# Altium PCB UL-SWAP-DAQ-2.PcbDoc (part 1 of 2)
Units mil, origin at the board's own origin, x right, y up, seen from the top; angles counter-clockwise.
Board outline 3000 x 3000 mil, 4 copper layers (Top Layer, GND, PWR, Bottom Layer), stack 23.756 mil thick; 123 components, 110 nets, 387 pads, 5 vias.
Unrouted connection lines stored in the file: 181.
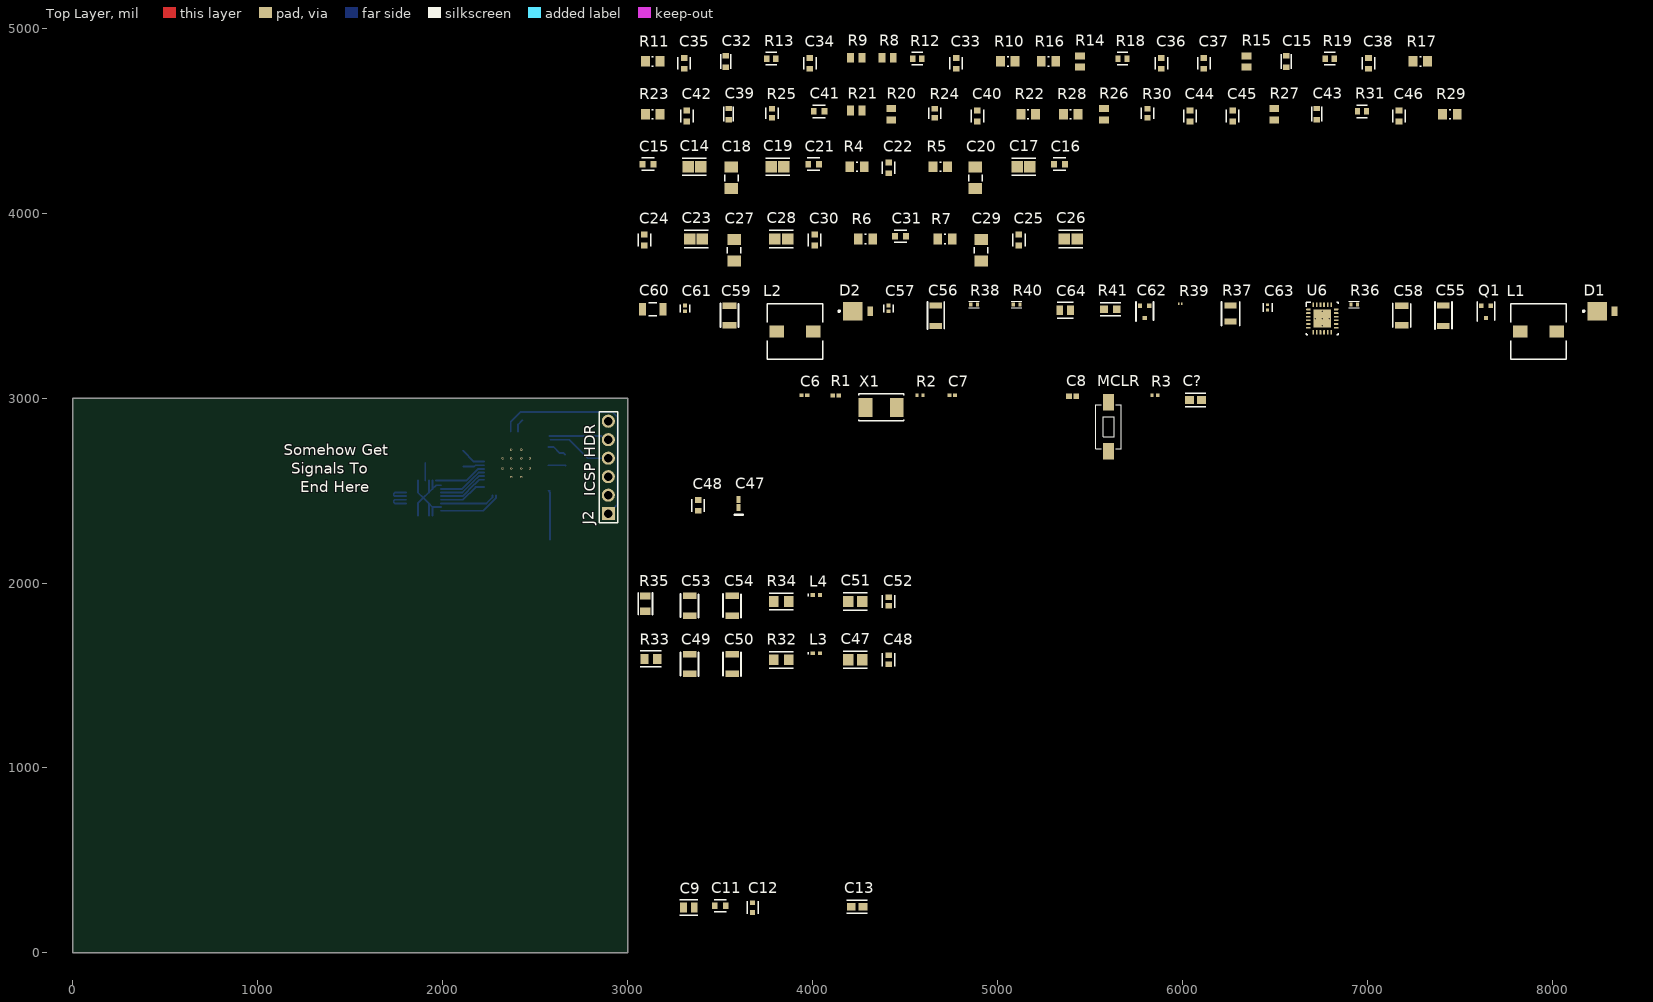
[diagram p0: Top Layer view]
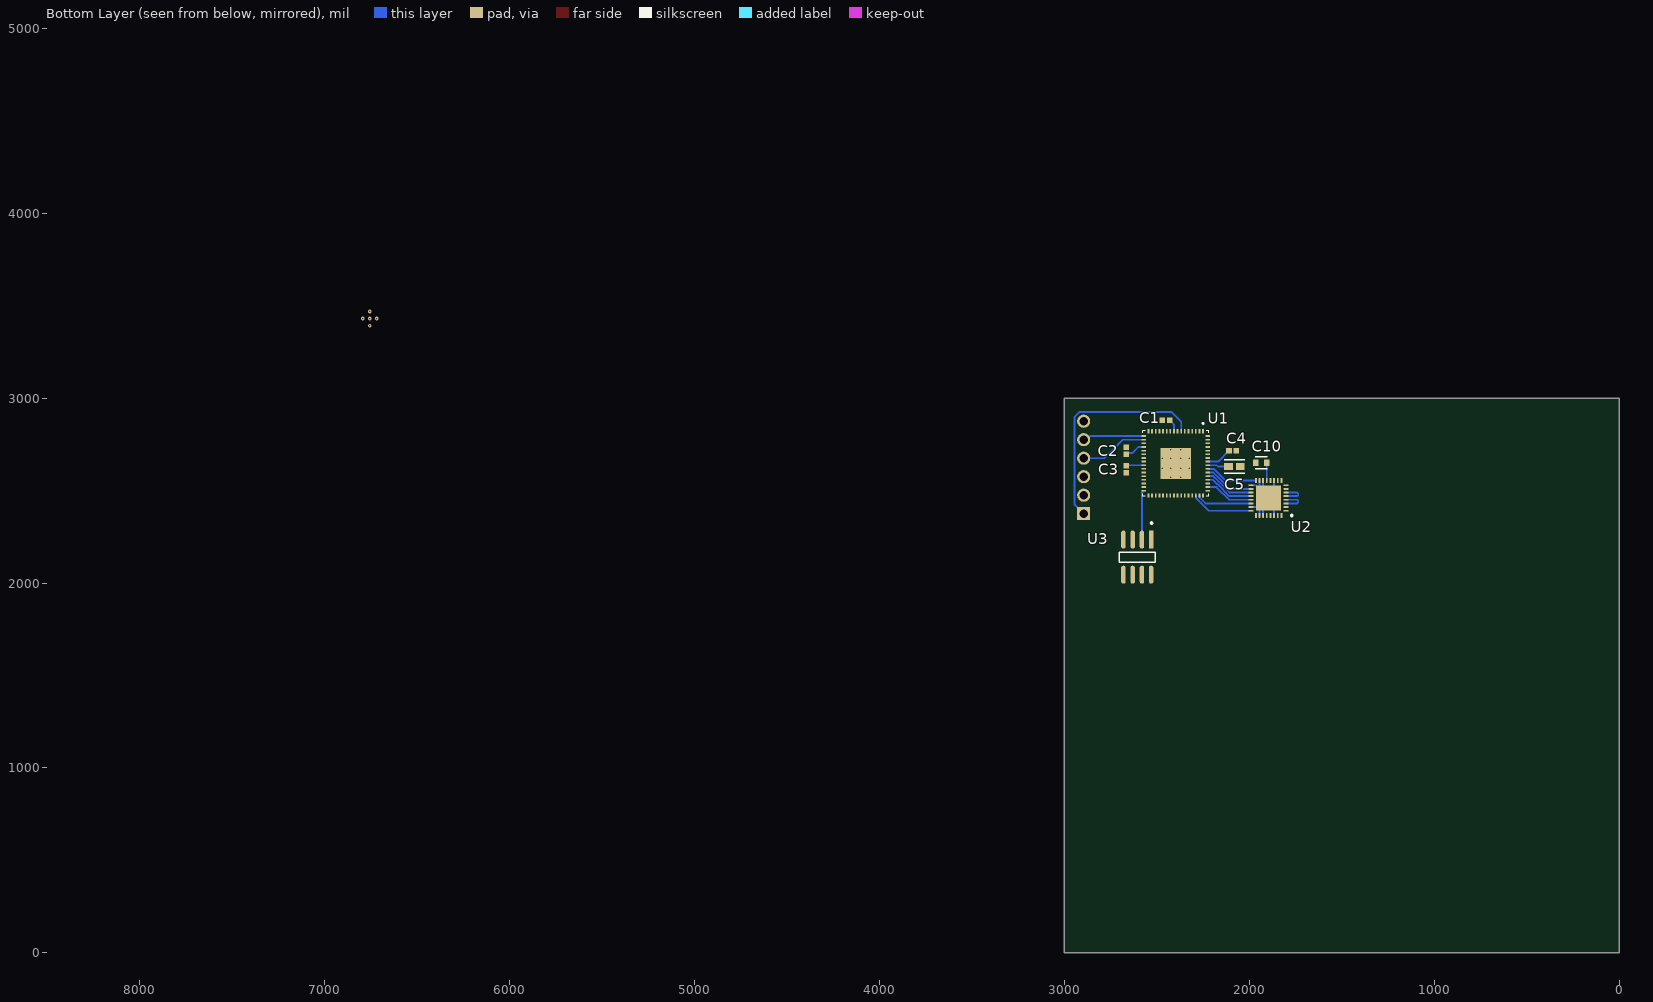
[diagram p1: Bottom Layer view, seen from below]
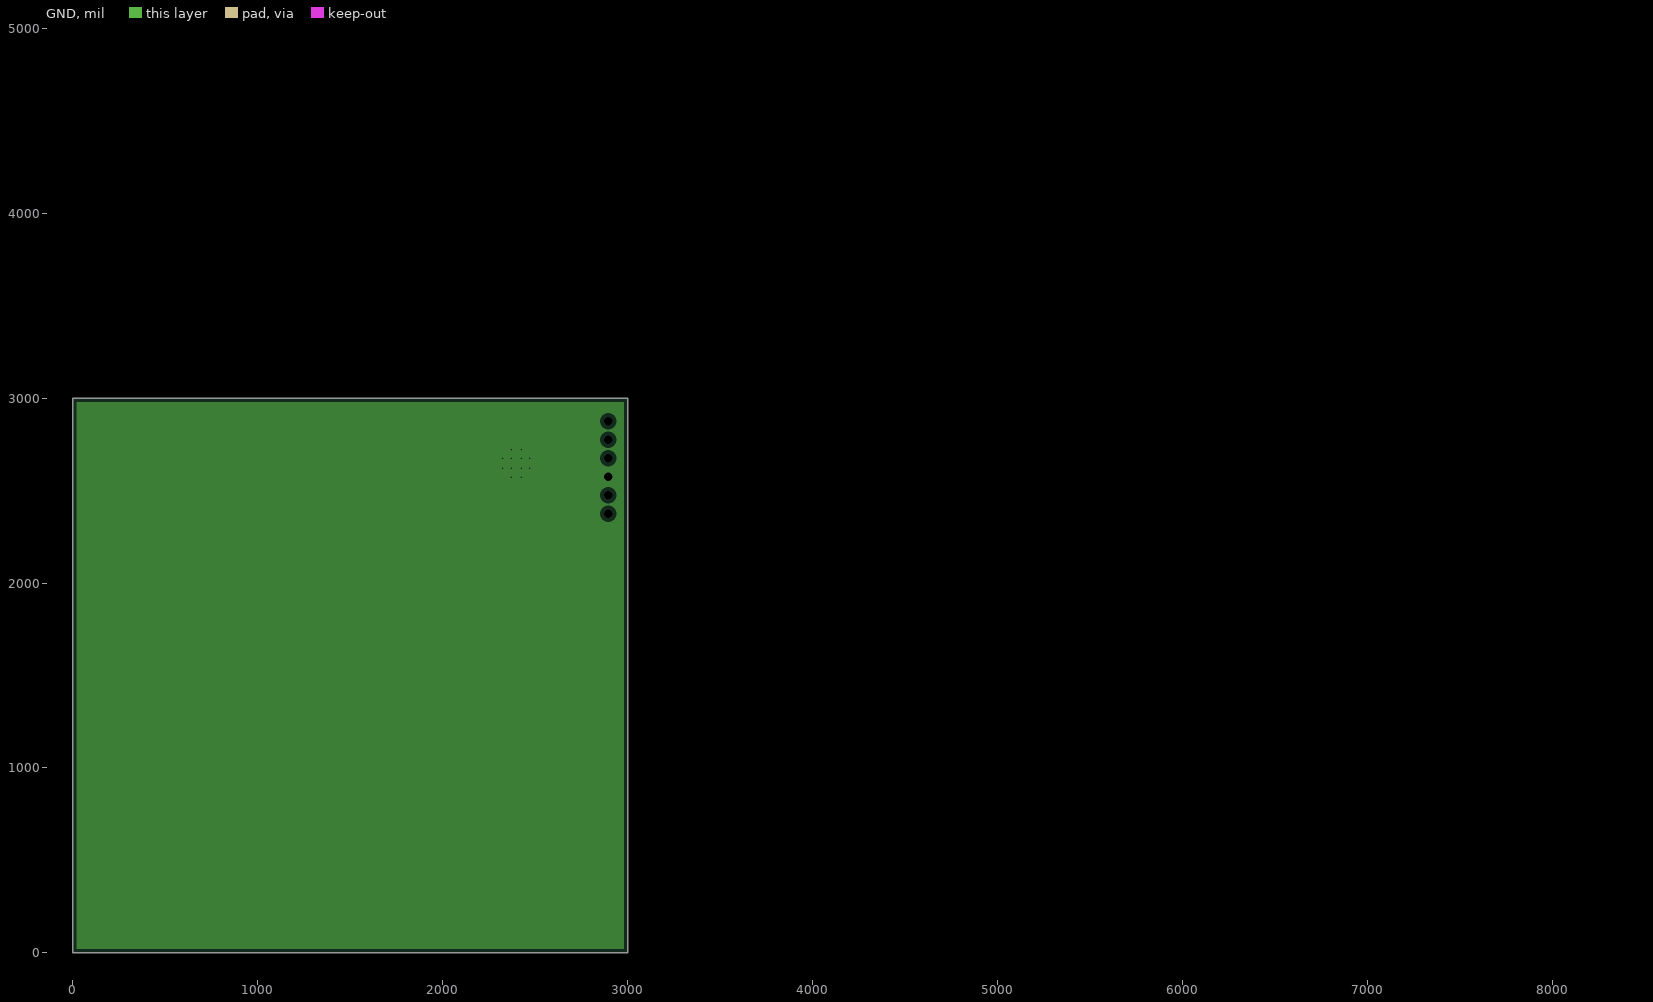
[diagram p2: GND, clearances drawn from the general rule]
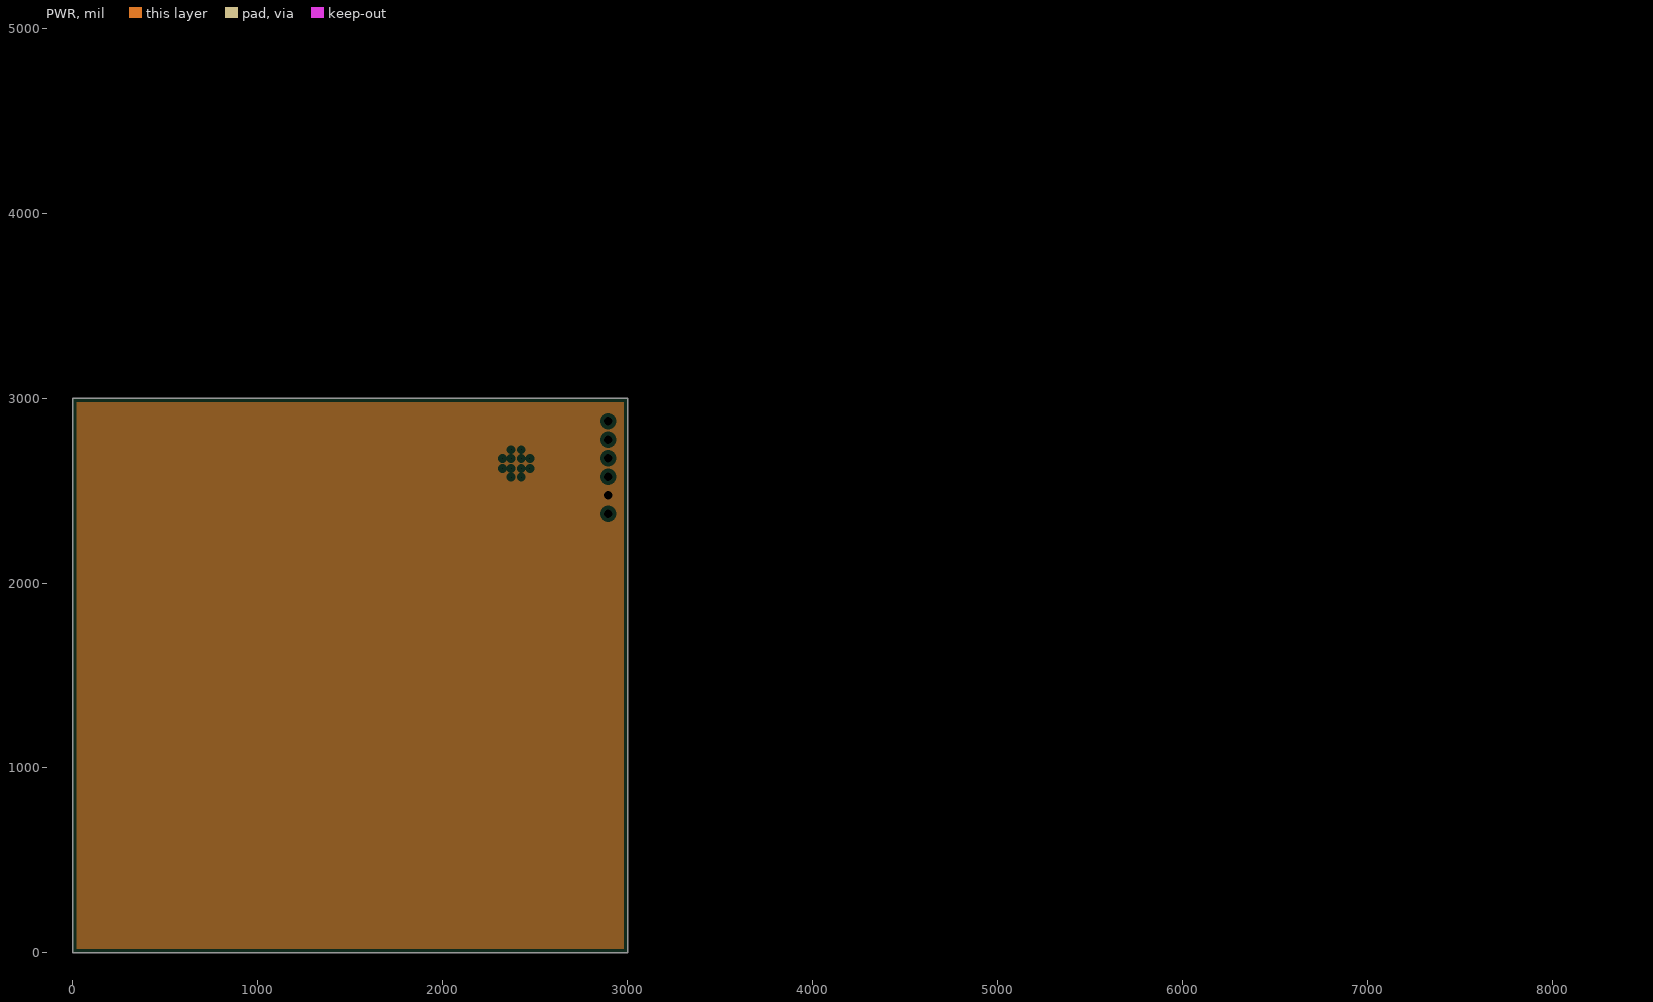
[diagram p3: PWR, clearances drawn from the general rule]

## Layer stack, top to bottom
Top Solder: solder mask 0.4, Solder Resist, Dk 3.5
Top Layer: signal copper 1.4
Dielectric 2: prepreg 2.8, PP-006, Dk 4.1
GND: plane copper 1.378, net GND
Dielectric 1: dielectric 12.6, FR-4, Dk 4.8
PWR: plane copper 1.378, net +3.3V
Dielectric 3: prepreg 2.8, PP-006, Dk 4.1
Bottom Layer: signal copper 1.4
Bottom Solder: solder mask 0.4, Solder Resist, Dk 3.5

## Board outline
0,0 3000,0 3000,3000 0,3000

## Design rules (kind name [scope] priority, off if disabled: settings)
Clearance [All] p1: gap=5 ignorepadtopadclearanceinfootprint=FALSE
DiffPairsRouting [All] p1: maxlimit=10 minlimit=10 mostfreqgap=10 toplayer_minwidth=15 toplayer_maxwidth=15 toplayer_prefwidth=15 bottomlayer_minwidth=15 bottomlayer_maxwidth=15 bottomlayer_prefwidth=15 maxuncoupledlength=500
NetAntennae [All] p1: netantennaetolerance=5
PlaneClearance [All] p1: clearance=20
PlaneConnect [All] p1: planeconnectstyle=Relief reliefexpansion=20 reliefentries=4 reliefconductorwidth=10 reliefairgap=10
PolygonConnect [All] p1: connectstyle=Relief reliefconductorwidth=10 reliefentries=4 polygonreliefangle="90 Angle" airgapwidth=10
RoutingVias [All] p1: holewidth=15 width=30 viastyle="Through Hole" minholewidth=10 minwidth=15 maxholewidth=50 maxwidth=100
ShortCircuit [All] p1: allowed=TRUE
SolderMaskExpansion [All] p1: expansion=0 istentingtop=FALSE
Width [All] p1: maxlimit=200 minlimit=5 preferedwidth=10
25 further rules are at their usual default settings.

## Classes and differential pairs
component class U8: C15 C32 C33 C34 C35 C36 C37 C38 R8 R9 R10 R11 R12 R13 R14 R15 R16 R17 R18 R19
component class U6: C39 C40 C41 C42 C43 C44 C45 C46 R20 R21 R22 R23 R24 R25 R26 R27 R28 R29 R30 R31 U6
component class U5: C14 C15 C16 C17 C18 C19 C20 C21 C22 R4 R5
component class U4: C23 C24 C25 C26 C27 C28 C29 C30 C31 R6 R7
component class TPS6513x: C55 C56 C57 C58 C59 C60 C61 C62 C63 C64 D1 D2 L1 L2 Q1 R36 R37 R38 R39 R40 R41 U6
component class PIC32_Subsystem: C1 C2 C3 C4 C5 C6 C7 C8 C? MCLR R1 R2 R3 U1 X1
component class LVDS_Driver_Subsystem: C47 C48 U3
component class "LMR51420 5V": B3 C51 C52 C53 C54 L4 R34 R35
component class "LMR51420 3.3V": B2 C47 C48 C49 C50 L3 R32 R33
component class ICD4_INTERFACE_MODULE: J2
component class ADC_Subsystem: C9 C10 C11 C12 C13 U2
differential pair Sensor_D: +Sensor_D_P -Sensor_D_N
differential pair Sensor_C: +Sensor_C_P -Sensor_C_N
differential pair Sensor_B: +Sensor_B_P -Sensor_B_N
differential pair Sensor_A: +Sensor_A_P -Sensor_A_N
differential pair DOUT: +DOUT_P -DOUT_N
differential pair ADC_CH6_CH7: +ADC_CH6_CH7_P -ADC_CH6_CH7_N
differential pair ADC_CH4_CH5: +ADC_CH4_CH5_P -ADC_CH4_CH5_N
differential pair ADC_CH2_CH3: +ADC_CH2_CH3_P -ADC_CH2_CH3_N
differential pair ADC_CH0_CH1: +ADC_CH0_CH1_P -ADC_CH0_CH1_N

## Components (designator, comment, footprint, x,y, rotation, side; value= is the part's Value field where it differs from the comment)
C1 "0.1uF" CAPC1050X55X23ML05T13 2450,2880 r0 bottom
C2 "0.1uF" CAPC1050X55X23ML05T13 2665,2715 r90 bottom
C3 "0.1uF" CAPC1050X55X23ML05T13 2665,2615 r270 bottom
C4 "0.1uF" CAPC1050X55X23ML05T13 2090,2715 r0 bottom
C5 "10uF" FP-GRM188-0_1-e0_2_0_55-IPC_A 2080,2630 r180 bottom
C6 "18pF" CAPC1005X55X25LL05T10 3955,3015 r0 top
C7 "18pF" CAPC1005X55X25LL05T10 4755,3015 r0 top
C8 "0.1uF" CAPC1050X55X23ML05T13 5405,3010 r0 top
C9 "47uF" FP-C0805C476M9PACTU-MFG 3330,245 r0 top
C10 "0.1 uF" FP-CC0603-DA-MFG 1935,2650 r0 bottom value="100 nF"
C11 "0.1 uF" FP-CC0603-DA-MFG 3500,255 r0 top value="100 nF"
C12 "2.2uF" FP-GRM188-0_1-e0_2_0_5-MFG 3675,245 r90 top
C13 "10uF" FP-GRM188-0_1-e0_2_0_55-IPC_A 4240,250 r0 top
C14 "C2012JB1A685K060AC" FP-C2012-060-0_2-IPC_A 3360,4250 r0 top
C15 "GQM1875C2ER10BB12D" FP-GQM187-0_15-MFG 6560,4820 r90 top
C15 "CC0603KRX7R7BB104" FP-CC0603-DA-MFG 3110,4265 r0 top value="100 nF"
C16 "CC0603KRX7R7BB104" FP-CC0603-DA-MFG 5335,4265 r0 top value="100 nF"
C17 "C2012JB1A685K060AC" FP-C2012-060-0_2-IPC_A 5140,4250 r0 top
C18 "GRM3195C1H163JA01D" FP-GRM319-0_15-IPC_A 3560,4190 r90 top
C19 "C2012JB1A685K060AC" FP-C2012-060-0_2-IPC_A 3810,4250 r0 top
C20 "GRM3195C1H163JA01D" FP-GRM319-0_15-IPC_A 4880,4190 r90 top
C21 "CC0603KRX7R7BB104" FP-CC0603-DA-MFG 4005,4265 r0 top value="100 nF"
C22 "CC0603KRX7R7BB104" FP-CC0603-DA-MFG 4410,4245 r90 top value="100 nF"
C23 "C2012JB1A685K060AC" FP-C2012-060-0_2-IPC_A 3370,3860 r0 top
C24 "CC0603KRX7R7BB104" FP-CC0603-DA-MFG 3090,3855 r90 top value="100 nF"
C25 "CC0603KRX7R7BB104" FP-CC0603-DA-MFG 5115,3855 r90 top value="100 nF"
C26 "C2012JB1A685K060AC" FP-C2012-060-0_2-IPC_A 5395,3860 r0 top
C27 "GRM3195C1H163JA01D" FP-GRM319-0_15-IPC_A 3575,3800 r90 top
C28 "C2012JB1A685K060AC" FP-C2012-060-0_2-IPC_A 3830,3860 r0 top
C29 "GRM3195C1H163JA01D" FP-GRM319-0_15-IPC_A 4910,3800 r90 top
C30 "CC0603KRX7R7BB104" FP-CC0603-DA-MFG 4010,3855 r90 top value="100 nF"
C31 "CC0603KRX7R7BB104" FP-CC0603-DA-MFG 4475,3875 r0 top value="100 nF"
C32 "GQM1875C2ER10BB12D" FP-GQM187-0_15-MFG 3530,4820 r90 top
C33 "CC0603KRX7R9BB392" FP-CC0603-DA-MFG 4775,4810 r90 top
C34 "CC0603KRX7R9BB392" FP-CC0603-DA-MFG 3985,4810 r90 top
C35 "CC0603KRX7R9BB392" FP-CC0603-DA-MFG 3305,4810 r90 top
C36 "CC0603KRX7R9BB392" FP-CC0603-DA-MFG 5885,4810 r90 top
C37 "CC0603KRX7R9BB392" FP-CC0603-DA-MFG 6115,4810 r90 top
C38 "CC0603KRX7R9BB392" FP-CC0603-DA-MFG 7005,4810 r90 top
C39 "GQM1875C2ER10BB12D" FP-GQM187-0_15-MFG 3545,4535 r90 top
C40 "CC0603KRX7R9BB392" FP-CC0603-DA-MFG 4890,4525 r90 top
C41 "CC0603KRX7R9BB392" FP-CC0603-DA-MFG 4035,4550 r0 top
C42 "CC0603KRX7R9BB392" FP-CC0603-DA-MFG 3320,4525 r90 top
C43 "GQM1875C2ER10BB12D" FP-GQM187-0_15-MFG 6725,4535 r90 top
C44 "CC0603KRX7R9BB392" FP-CC0603-DA-MFG 6040,4525 r90 top
C45 "CC0603KRX7R9BB392" FP-CC0603-DA-MFG 6270,4525 r90 top
C46 "CC0603KRX7R9BB392" FP-CC0603-DA-MFG 7170,4525 r90 top
C47 "UMK212BBJ225MD-T" FP-0805-L_2_0_0_2-W_1_25-IPC_A 4230,1585 r0 top
C47 "10 uF" VISH-TR8-M_L 3600,2430 r90 top
C48 "C0603C104K4PAC7867" FP-C0603C-CF-MFG 4410,1585 r90 top value="0.10 μF"
C48 "0.1 uF" FP-CC0603-DA-MFG 3380,2420 r90 top value="100 nF"
C49 "Comment" Cap22uF_C1206C226M4PAC7800 3335,1615 r0 top value=22uF
C50 "Comment" Cap22uF_C1206C226M4PAC7800 3565,1615 r0 top value=22uF
C51 "UMK212BBJ225MD-T" FP-0805-L_2_0_0_2-W_1_25-IPC_A 4230,1900 r0 top
C52 "C0603C104K4PAC7867" FP-C0603C-CF-MFG 4410,1900 r90 top value="0.10 μF"
C53 "Comment" Cap22uF_C1206C226M4PAC7800 3335,1930 r0 top value=22uF
C54 "Comment" Cap22uF_C1206C226M4PAC7800 3565,1930 r0 top value=22uF
C55 "Comment" 4.7uF_C1206C475K3RACAUTO 7410,3500 r0 top value=4.7uF
C56 "Comment" 4.7uF_C1206C475K3RACAUTO 4665,3500 r0 top value=4.7uF
C57 "C0402C104K8PAC" FP-C0402-BB-MFG 4410,3485 r90 top value="0.10 μF"
C58 "Comment" Cap22uF_C1206C226M4PAC7800 7185,3500 r0 top value=22uF
C59 "Comment" Cap22uF_C1206C226M4PAC7800 3550,3500 r0 top value=22uF
C60 "C1206C472J5GAC" FP-C1206C-EB-MFG 3135,3480 r0 top value="4,700 pF"
C61 "C0402C103J4RAC" FP-C0402-BB-MFG 3310,3485 r90 top value="10,000 pF"
C62 "Comment" PCBComponent_1 5795,3500 r0 top value=220nF
C63 "CGA1A2C0G1E6R8D030BA" FP-CGA1A-0_1-0_03-IPC_B 6460,3490 r90 top
C64 "C0805C759D5GACTU" FP-C0805C-DN-MFG 5365,3475 r0 top value="7.5 pF"
C? "06031A180JAT2A" FP-0603-L_1_6_0_15-W_0_81-IPC_A 6070,2990 r0 top
D1 "MBRM120ET3G" ONSC-POWERMITE-2-457-04_D_V 8295,3470 r0 top
D2 "MBRM120ET3G" ONSC-POWERMITE-2-457-04_D_V 4270,3470 r0 top
J2 "ICSP_HDR" ICSP_HDR 2895,2625 r90 top
L1 "7447789004" WE-PD-S-PB 7925,3360 r0 top
L2 "7447789004" WE-PD-S-PB 3905,3360 r0 top
L3 "MSS1260H-822MED" 0402-A 4020,1620 r0 top value=8.2uH
L4 "Inductor" 0402-A 4020,1935 r0 top value=10uH
MCLR "434121043816" 434121043816 5600,2845 r90 top
Q1 "Comment" PCBComponent_1 7640,3500 r0 top
R1 "0R" RESC1005X40X25NL05T10 4125,3015 r0 top
R2 "1M" RESC1005X40X25LL05T05 4580,3015 r0 top
R3 "10k" RESC1005X40X25LL05T05 5850,3015 r0 top
R4 "RC0805FR-071KL" RESC2013X60X35ML10T20 4240,4250 r0 top
R5 "RC0805FR-071KL" RESC2013X60X35ML10T20 4690,4250 r0 top
R6 "RC0805FR-071KL" RESC2013X60X35ML10T20 4285,3860 r0 top
R7 "RC0805FR-071KL" RESC2013X60X35ML10T20 4715,3860 r0 top
R8 "ERJ-6ENF1241V" RESC2013X70X40LL20T20 4405,4840 r0 top
R9 "ERJ-6ENF1241V" RESC2013X70X40LL20T20 4235,4840 r0 top
R10 "RC0805FR-071KL" RESC2013X60X35ML10T20 5055,4820 r0 top
R11 "RC0805FR-071KL" RESC2013X60X35ML10T20 3135,4820 r0 top
R12 "CRCW060335K7FKEA" FP-CRCW0603-e3-IPC_C 4565,4835 r0 top
R13 "CRCW060335K7FKEA" FP-CRCW0603-e3-IPC_C 3775,4835 r0 top
R14 "ERJ-6ENF1241V" RESC2013X70X40LL20T20 5445,4820 r90 top
R15 "ERJ-6ENF1241V" RESC2013X70X40LL20T20 6345,4820 r90 top
R16 "RC0805FR-071KL" RESC2013X60X35ML10T20 5275,4820 r0 top
R17 "RC0805FR-071KL" RESC2013X60X35ML10T20 7285,4820 r0 top
R18 "CRCW060335K7FKEA" FP-CRCW0603-e3-IPC_C 5675,4835 r0 top
R19 "CRCW060335K7FKEA" FP-CRCW0603-e3-IPC_C 6795,4835 r0 top
R20 "ERJ-6ENF1241V" RESC2013X70X40LL20T20 4425,4535 r90 top
R21 "ERJ-6ENF1241V" RESC2013X70X40LL20T20 4235,4555 r0 top
R22 "RC0805FR-071KL" RESC2013X60X35ML10T20 5165,4535 r0 top
R23 "RC0805FR-071KL" RESC2013X60X35ML10T20 3135,4535 r0 top
R24 "CRCW060335K7FKEA" FP-CRCW0603-e3-IPC_C 4660,4540 r90 top
R25 "CRCW060335K7FKEA" FP-CRCW0603-e3-IPC_C 3780,4540 r90 top
R26 "ERJ-6ENF1241V" RESC2013X70X40LL20T20 5575,4535 r90 top
R27 "ERJ-6ENF1241V" RESC2013X70X40LL20T20 6495,4535 r90 top
R28 "RC0805FR-071KL" RESC2013X60X35ML10T20 5395,4535 r0 top
R29 "RC0805FR-071KL" RESC2013X60X35ML10T20 7445,4535 r0 top
R30 "CRCW060335K7FKEA" FP-CRCW0603-e3-IPC_C 5810,4540 r90 top
R31 "CRCW060335K7FKEA" FP-CRCW0603-e3-IPC_C 6970,4550 r0 top
R32 "RK73G2ATTD1003F" FP-RK73G2A-IPC_A 3830,1585 r0 top
R33 "RMCF0805FG22K1" FP-RMCF0805-IPC_B 3125,1590 r0 top
R34 "RK73G2ATTD1003F" FP-RK73G2A-IPC_A 3830,1900 r0 top
R35 "RMCF0805FT13K7CT-ND" RMCF0805FT13K7_13.7k 3095,1930 r0 top value=13.7K
R36 "ESR01MZPF1004" 1Mohm_ESR01MZPF1004 6910,3505 r90 top value=1M
R37 "SFR03EZPF1303" 130k_RGV3216P-1303-B-T1 6260,3500 r0 top value=130K
R38 "Comment" 1Mohm_ESR01MZPF1004 4855,3505 r90 top value=1M
R39 "Comment" 121k_RE0201BRE07121KL 5980,3510 r90 top value=121K
R40 "Comment" 200ohm_ESR01MZPF2000 5085,3505 r90 top value=.2K
R41 "AC0603FR-10100RL" FP-AC0603-IPC_A 5610,3480 r0 top
U1 "PIC32MX470-F512H-120MR" QFN50P900X900X100-65N 2397.05,2646.77 r270 bottom
U2 "LTC2373CUH-16#PBF" LTC_2373_Footprint 1895,2460 r0 bottom
U3 "ADN4661BRZ" FP-R-8-IPC_A 2605,2140 r270 bottom
U6 "TPS6513x" RGE0024B_V 6755,3430 r0 top
X1 "20MHz" FP-ABM7-MFG 4370,2950 r0 top

## Footprints (in the part's own frame and the unit in brackets; to place one, negate y for a bottom-side part, rotate by r counter-clockwise, add the part's x,y. Pads: shape width x height; smd on the part's side, far side on the other; paste and mask are expansions set on the pad)
1Mohm_ESR01MZPF1004 [mm]
  rect 0.55x0.45 smd: 7(0,0) 8(0,-0.9)
  silkscreen extent -0.45,-1.17 0.45,0.28
4.7uF_C1206C475K3RACAUTO [mm]
  rect 1.7x0.8 smd: 13(0,0) 14(0,-2.8)
  silkscreen extent -1.15,-3.2 1.17,0.5
121k_RE0201BRE07121KL [mm]
  rect 0.35x0.2 smd: 9(0,0) 10(0,-0.42)
130k_RGV3216P-1303-B-T1 [mm]
  rect 1.65x0.8 smd: 5(0,0) 6(0,-2.2)
  silkscreen extent -1.25,-2.75 1.25,0.5
200ohm_ESR01MZPF2000 [mm]
  rect 0.55x0.45 smd: 7(0,0) 8(0,-0.9)
  silkscreen extent -0.45,-1.17 0.45,0.28
0402-A [mm] "Chip Inductor, Body 1.0x0.5mm, IPC High Density"
  rect 0.6x0.5 smd: 1(-0.5,0) 2(0.5,0)
  silkscreen extent -1.1,-0.15 -1.1,0.15, body extent -0.55,-0.3 0.55,0.3, height 0.55
434121043816 [mm] "6.0*3.5mm vertical type, SMD, height 4.3mm, black actuator, 160gf, T&R"
  rect 2.3x1.5 smd: 1(-3.35,0) 2(3.35,0)
  silkscreen extent -3,-1.75 3,1.75, body extent -4,-1.75 4,1.75, height 4.3
Cap22uF_C1206C226M4PAC7800 [mm]
  rect 1.9x0.9 smd: 7(0,0) 8(0,-2.7)
  silkscreen extent -1.25,-2.98 1.22,0.28
CAPC1005X55X25LL05T10 [mm] "Chip Capacitor, 2-Leads, Body 1.00x0.50mm, IPC High Density"
  rect 0.56x0.52 smd: 1(-0.39,0) 2(0.39,0)
  body extent -0.53,-0.28 0.53,0.28, height 0.55
CAPC1050X55X23ML05T13 [mm] "Chip Capacitor, 2-Leads, Body 1.05x0.55mm, IPC Low Density"
  rect 0.76x0.72 smd: 1(-0.49,0) 2(0.49,0)
  body extent -0.53,-0.28 0.53,0.27, height 0.55
FP-0603-L_1_6_0_15-W_0_81-IPC_A [mil]
  rect 47.5x42.06 smd paste+0 mask+0: 1(-32.51,0) 2(32.51,0)
  silkscreen extent -56,-37 56,37, body extent -76,-41 76,41, height 10
FP-0805-L_2_0_0_2-W_1_25-IPC_A [mil]
  rect 55.42x61.5 smd paste+0 mask+0: 1(-37.49,0) 2(37.49,0)
  silkscreen extent -65,-46 65,46, body extent -85,-50 85,50, height 10
FP-ABM7-MFG [mm]
  rect 1.9x2.6 smd paste+0 mask+0: 1(-2.15,0) 2(2.15,0)
  silkscreen extent -3.1,-1.85 3.1,1.85, body extent -3.2,-1.95 3.2,1.95, height 0.25
FP-AC0603-IPC_A [mil]
  rect 41.68x39.85 smd paste+0 mask+0: 1(-34.52,0) 2(34.52,0)
  silkscreen extent -55,-36 55,36, body extent -75,-40 75,40, height 10
FP-C0402-BB-MFG [mm]
  rect 0.52x0.52 smd paste+0 mask+0: 1(-0.4,0) 2(0.4,0)
  silkscreen extent -0.5,-0.64 0.5,0.64, body extent -0.8,-0.4 0.8,0.4, height 0.25
FP-C0603C-CF-MFG [mm]
  rect 0.75x0.9 smd paste+0 mask+0: 1(-0.6,0) 2(0.6,0)
  silkscreen extent -0.87,-0.85 0.88,0.85, body extent -1.2,-0.6 1.2,0.6, height 0.25
FP-C0805C476M9PACTU-MFG [mm]
  rect 0.95x1.35 smd paste+0 mask+0: 1(-0.75,0) 2(0.75,0)
  silkscreen extent -1.25,-1.05 1.25,1.05, body extent -1.4,-0.85 1.4,0.85, height 0.25
FP-C0805C-DN-MFG [mm]
  rect 0.95x1.35 smd paste+0 mask+0: 1(-0.75,0) 2(0.75,0)
  silkscreen extent -1.1,-1.07 1.1,1.07, body extent -1.4,-0.85 1.4,0.85, height 0.25
FP-C1206C-EB-MFG [mm]
  rect 0.95x1.7 smd paste+0 mask+0: 1(-1.4,0) 2(1.4,0)
  silkscreen extent -0.55,-0.9 0.55,0.9, body extent -2,-1 2,1, height 0.25
FP-C2012-060-0_2-IPC_A [mil]
  rect 62.13x61.27 smd paste+0 mask+0: 1(-34.02,0) 2(34.02,0)
  silkscreen extent -65,-46 65,46, body extent -85,-50 85,50, height 10
FP-CC0603-DA-MFG [mm]
  rect 0.8x0.9 smd paste+0 mask+0: 1(-0.75,0) 2(0.75,0)
  silkscreen extent -0.85,-0.85 0.85,0.85, body extent -0.8,-0.4 0.8,0.4, height 0.9
FP-CGA1A-0_1-0_03-IPC_B [mil]
  rect 15.08x16.46 smd paste+0 mask+0: 1(-14.47,0) 2(14.47,0)
  silkscreen extent -22,-24 22,24, body extent -28,-14 28,14, height 10
FP-CRCW0603-e3-IPC_C [mil]
  rect 28.94x33.94 smd paste+0 mask+0: 1(-24.23,0) 2(24.23,0)
  silkscreen extent -30,-33 30,33, body extent -43,-23 43,23, height 10
FP-GQM187-0_15-MFG [mm]
  rect 0.75x0.9 smd paste+0 mask+0: 1(-0.775,0) 2(0.775,0)
  silkscreen extent -1,-0.67 1,0.67, body extent -1.25,-0.58 1.25,0.58, height 0.25
FP-GRM188-0_1-e0_2_0_5-MFG [mm]
  rect 0.65x0.7 smd paste+0 mask+0: 1(-0.675,0) 2(0.675,0)
  silkscreen extent -0.85,-0.75 0.85,0.75, body extent -1.1,-0.55 1.1,0.55, height 0.25
FP-GRM188-0_1-e0_2_0_55-IPC_A [mil]
  rect 47.57x39.85 smd paste+0 mask+0: 1(-31.57,0) 2(31.57,0)
  silkscreen extent -55,-36 55,36, body extent -31,-16 31,16, height 36
FP-GRM319-0_15-IPC_A [mil]
  rect 59.28x73.16 smd paste+0 mask+0: 1(-58.12,0) 2(58.12,0)
  silkscreen extent -17,-37 17,37, body extent -107,-56 107,56, height 10
FP-R-8-IPC_A [mil]
  rect 97.4x24.49 smd paste+0 mask+0: 1(-95.12,75)
  rrect100% 97.4x24.49 smd paste+0 mask+0: 2(-95.12,25) 3(-95.12,-25) 4(-95.12,-75) 5(95.12,-75) 6(95.12,-25) 7(95.12,25) 8(95.12,75)
  silkscreen extent -189,-96 27,96, body extent -118,-96 118,96, height 69
FP-RK73G2A-IPC_A [mil]
  rect 49.42x57.56 smd paste+0 mask+0: 1(-40.37,0) 2(40.37,0)
  silkscreen extent -65,-45 65,45, body extent -85,-48 85,48, height 10
FP-RMCF0805-IPC_B [mil]
  rect 45.46x53.63 smd paste+0 mask+0: 1(-34.48,0) 2(34.48,0)
  silkscreen extent -57,-43 57,43, body extent -67,-37 67,37, height 10
ICSP_HDR [mil]
  rect 70x70 hole 47.5: 1(-250,0)
  round 71 hole 47.5: 2(-150,0) 3(-50,0) 4(50,0) 5(150,0) 6(250,0)
  silkscreen extent -300,-50 300,50
LTC_2373_Footprint [mm]
  rrect40% 0.7x0.25 smd: 1(-2.4,1.75) 2(-2.4,1.25) 3(-2.4,0.75) 4(-2.4,0.25) 5(-2.4,-0.25) 6(-2.4,-0.75) 7(-2.4,-1.25) 8(-2.4,-1.75) 17(2.4,-1.75) 18(2.4,-1.25) 19(2.4,-0.75) 20(2.4,-0.25) 21(2.4,0.25) 22(2.4,0.75) 23(2.4,1.25) 24(2.4,1.75)
  rrect40% 0.25x0.7 smd: 9(-1.75,-2.4) 10(-1.25,-2.4) 11(-0.75,-2.4) 12(-0.25,-2.4) 13(0.25,-2.4) 14(0.75,-2.4) 15(1.25,-2.4) 16(1.75,-2.4) 25(1.75,2.4) 26(1.25,2.4) 27(0.75,2.4) 28(0.25,2.4) 29(-0.25,2.4) 30(-0.75,2.4) 31(-1.25,2.4) 32(-1.75,2.4)
  rect 3.45x3.45 smd: 33(0,0)
  silkscreen extent -3.3,2.29 -3.05,2.54, body extent -2.54,-2.54 2.54,2.54, height 0.81
ONSC-POWERMITE-2-457-04_D_V [mil] "POWERMITE, 2-Leads, Body 1.965x1.9mm"
  rect 105.12x100 smd: 1(-52.56,0)
  rect 30x50 smd: 2(40,0)
  silkscreen extent -132,-5 -122,5, body extent -80,-37 -3,37, height 45
PCBComponent_1 [mm]
  rect 0.6x0.6 smd: 15(-0.65,0) 16(0.65,0) 17(0,-1.7)
  silkscreen extent -1.2,-2.1 1.2,0.5
QFN50P900X900X100-65N [mm]
  rrect25% 0.6x0.24 smd: 1(-4.4,3.75) 2(-4.4,3.25) 3(-4.4,2.75) 4(-4.4,2.25) 5(-4.4,1.75) 6(-4.4,1.25) 7(-4.4,0.75) 8(-4.4,0.25) 9(-4.4,-0.25) 10(-4.4,-0.75) 11(-4.4,-1.25) 12(-4.4,-1.75) 13(-4.4,-2.25) 14(-4.4,-2.75) 15(-4.4,-3.25) 33(4.4,-3.75) 34(4.4,-3.25) 35(4.4,-2.75) 36(4.4,-2.25) 37(4.4,-1.75) 38(4.4,-1.25) 39(4.4,-0.75) 40(4.4,-0.25) 41(4.4,0.25) 42(4.4,0.75) 43(4.4,1.25) 44(4.4,1.75) 45(4.4,2.25) 46(4.4,2.75) 47(4.4,3.25) 48(4.4,3.75)
  rrect25% 0.6x0.24 smd mask+0: 16(-4.4,-3.75)
  rrect25% 0.24x0.6 smd: 17(-3.75,-4.4) 18(-3.25,-4.4) 19(-2.75,-4.4) 20(-2.25,-4.4) 21(-1.75,-4.4) 22(-1.25,-4.4) 23(-0.75,-4.4) 24(-0.25,-4.4) 25(0.25,-4.4) 26(0.75,-4.4) 27(1.25,-4.4) 28(1.75,-4.4) 29(2.25,-4.4) 30(2.75,-4.4) 31(3.25,-4.4) 32(3.75,-4.4) 49(3.75,4.4) 50(3.25,4.4) 51(2.75,4.4) 52(2.25,4.4) 53(1.75,4.4) 54(1.25,4.4) 55(0.75,4.4) 56(0.25,4.4) 57(-0.25,4.4) 58(-0.75,4.4) 59(-1.25,4.4) 60(-1.75,4.4) 61(-2.25,4.4) 62(-2.75,4.4) 63(-3.25,4.4) 64(-3.75,4.4)
  rect 4.25x4.25 smd paste-1.53: 65(0,0)
  round 0.3 hole 0.2 mask+0: 66(-0.695,1.875) 67(0.695,1.875) 68(-1.875,0.695) 69(-0.695,0.695) 70(0.695,0.695) 71(1.875,0.695) 72(-1.875,-0.695) 73(-0.695,-0.695) 74(0.695,-0.695) 75(1.875,-0.695) 76(-0.695,-1.875) 77(0.695,-1.875)
  silkscreen extent -5.59,-4.5 4.5,4.5, body extent -4.5,-4.5 4.5,4.5, height 1
RESC1005X40X25LL05T05 [mm] "Chip Resistor, 2-Leads, Body 1.05x0.55mm, IPC High Density"
  rect 0.45x0.45 smd: 1(-0.4,0) 2(0.4,0)
  body extent -0.53,-0.28 0.53,0.28, height 0.4
RESC1005X40X25NL05T10 [mm] "Chip Resistor, 2-Leads, Body 1.00x0.50mm, IPC Medium Density"
  rect 0.6x0.55 smd: 1(-0.425,0) 2(0.425,0)
  body extent -0.53,-0.27 0.53,0.28, height 0.4
RESC2013X60X35ML10T20 [mm] "Chip Resistor, 2-Leads, Body 2.1x1.35mm, IPC Low Density"
  rect 1.2x1.45 smd: 1(-1,0) 2(1,0)
  silkscreen extent -0.1,-0.63 0.1,0.63, body extent -1.05,-0.68 1.05,0.67, height 0.6
RESC2013X70X40LL20T20 [mm] "Chip Resistor, 2-Leads, Body 2.00x1.25mm, IPC High Density"
  rect 0.95x1.35 smd: 1(-0.775,0) 2(0.775,0)
  body extent -1.1,-0.72 1.1,0.72, height 0.7
RGE0024B_V [mm] "QFN, 24-Leads, Body 4x4mm, Pitch 0.5mm, Thermal Pad 2.45x2.45mm"
  rrect42% 0.6x0.24 smd: 1(-1.9,1.25) 2(-1.9,0.75) 3(-1.9,0.25) 4(-1.9,-0.25) 5(-1.9,-0.75) 6(-1.9,-1.25) 13(1.9,-1.25) 14(1.9,-0.75) 15(1.9,-0.25) 16(1.9,0.25) 17(1.9,0.75) 18(1.9,1.25)
  rrect42% 0.24x0.6 smd: 7(-1.25,-1.9) 8(-0.75,-1.9) 9(-0.25,-1.9) 10(0.25,-1.9) 11(0.75,-1.9) 12(1.25,-1.9) 19(1.25,1.9) 20(0.75,1.9) 21(0.25,1.9) 22(-0.25,1.9) 23(-0.75,1.9) 24(-1.25,1.9)
  rrect4% 2.45x2.45 smd paste-1.225: 25(0,0)
  silkscreen extent -2.22,-2.22 2.22,2.22, body extent -2.07,-2.07 2.07,2.07, height 1.01
RMCF0805FT13K7_13.7k [mm]
  rect 1.4x1 smd: 9(0,0) 10(0,-2.1)
  silkscreen extent -0.97,-2.55 0.97,0.45
VISH-TR8-M_L [mm] "Molded Capacitor, 2-Leads, Body 1.8x1.05mm, IPC High Density"
  rect 0.95x0.55 smd: 1(-0.575,0) 2(0.575,0)
  silkscreen extent -1.55,-0.53 -1.55,0.53, body extent -1.12,-0.53 1.12,0.53, height 0.9
WE-PD-S-PB [mm] "SMD Inductor, 2-Leads, Body 7.3x7.3x3.5 mm"
  rect 2x1.7 smd: 1(-2.5,0) 2(2.5,0)
  silkscreen extent -3.8,-3.8 3.8,3.8, body extent -3.65,-3.65 3.65,3.65, height 3.19

## Part data
C1 C2 C3 C4 C8: library part CMP-2000-05439-1, "Chip Capacitor, 100 nF, +/- 10%, 16 V, -55 to 125 degC, 0402 (1005 Metric), RoHS, Tape and Reel / CL05B104KO5NNNC", Capacitance=100000pF, Case Size/Dimension=0402, Dielectric=X7R, Manufacturer="Samsung Electro-Mechanics", Rated Voltage=16V, Tolerance (%)=±10%, Datasheet URL=https://datasheet.ciiva.com/29198/458718-da-01-en-vs-kondensator-0402-29198423.pdf, Datasheet Version=Nov-10, Manufacturer URL=http://www.samsungsem.com/global/index.jsp
C5 C13: library part CMP-2006-02792-2, "Chip Multilayer Ceramic Capacitors for General Purpose, 0603, 10uF, X5R, 15%, 20%, 6.3V / GRM188R60J106ME47D", Case Code (Imperial)=0603, Case Code (Metric)=1608, Dielectric=X5R, Max Operating Temperature=85°C, Min Operating Temperature=-55°C, Package Quantity=4000, Tolerance=20%, Voltage=6.3V, Capacitance=10uF, Case/Package=0603, Depth=0.8mm, Height=0.8mm, Lead Free="Lead Free", Length=1.6mm, Material=Ceramic, Mount="Surface Mount", Packaging="Tape and Reel", Radiation Hardening=No, REACH SVHC="No SVHC", Termination=SMD/SMT, Thickness=0.035inch, Voltage Rating=6.3V, Voltage Rating (DC)=6.3V, Width=0.031inch
C6 C7: library part CMP-2008-04271-1, "GRM1555C1H180GA01D", Manufacturer=Murata, Part Number=GRM1555C1H180GA01D
C9: library part CMP-2007-01008-2, "CAP CER 47UF 6.3V X5R 0805 / C0805C476M9PACTU", Case Code (Imperial)=0805, Case Code (Metric)=2012, Dielectric=X5R, Dielectric Material=Ceramic, Max Operating Temperature=85°C, Min Operating Temperature=-55°C, Package Quantity=3000, Tolerance=20%, Voltage=6.3V, Capacitance=47uF, Case/Package=0805, Construction=Flat, Depth=1.25mm, Dissipation Factor=5%, Height=1.25mm, Length=2mm, Mount=PCB, Number of Pins=2, Packaging="Tape and Reel", Radiation Hardening=No, REACH SVHC="No SVHC", RoHS Compliant=Yes, Series=C0805C, Termination=SMD/SMT, Voltage Rating=6.3V, Voltage Rating (DC)=6.3V, Width=1.2mm
C10 C11 C48: library part CMP-2000-05002-2, "CAP CER 0.1UF 16V X7R 0603 CC0603KRX7R7BB104", Capacitance="100 nF", Manufacturer=YAGEO, Manufacturer Part Number=CC0603KRX7R7BB104, Package=CC0603-DA, Temperature="-55°C to +125°C", Temperature Characteristic=X7R, Temperature Coefficient=15%, Temperature Range High=+125°C, Temperature Range Low=-55°C, Tolerance=0.1, Voltage="16 V", Automotive=No, Category=Cap, ComponentLink2Description=Datasheet, ComponentLink2URL=http://www.yageo.com/documents/recent/UPY-GPHC_X7R_6.3V-to-50V_18.pdf, Device Class L1="Passive Components", Device Class L2=Capacitors, Device Class L3="Ceramic Capacitors", Digikey Description="CAP CER 0.1UF 16V X7R 0603", Footprint Url=http://www.yageo.com/exep/pages/download/literatures/UPY-C_GEN_24.pdf, Height=0.9mm, Lead Free=Yes, Material=Ceramic, Mouser Description="Multilayer Ceramic Capacitor, CC Series, 0.1 - F, - 10%, X7R, 16 V, 0603 [1608 Metric]", Octopart=https://octopart.com/cc0603krx7r7bb104-yageo-192941, RoHS=TRUE, Voltage Rating="16 V"
C12: library part CMP-2006-02836-2, "Chip Multilayer Ceramic Capacitors for General Purpose, 0603, 2.2uF, X7R, 15%, 10%, 10V / GRM188R71A225KE15D", Case Code (Imperial)=0603, Case Code (Metric)=1608, Dielectric=X7R, Max Operating Temperature=125°C, Min Operating Temperature=-55°C, Package Quantity=1, Tolerance=10%, Voltage=10V, Capacitance=2.2uF, Case/Package=0603, Depth=0.8mm, Height=0.8mm, Lead Free="Lead Free", Length=1.6mm, Material=Ceramic, Mount="Surface Mount", Number of Pins=2, Packaging="Cut Tape", REACH SVHC="No SVHC", Termination=SMD/SMT, Thickness=0.035inch, Voltage Rating=10V, Voltage Rating (DC)=10V, Weight=7.1E-05oz, Width=0.031inch
C14 C17 C19 C23 C26 C28: library part CMP-08246-004641-1, "Multilayer Ceramic Capacitors 6.8μF ±10% 10V JB SMD 0805", Capacitance=6.8uF, Case Code (Imperial)=2012, Case Code (Metric)=5032, Case/Package=0805, Dielectric Material=Ceramic, Max Operating Temperature=85°C, Min Operating Temperature=-25°C, Package Quantity=4000, Tolerance=10%, Voltage Rating=10V, Lead Free="Lead Free", Length=0.079inch, Mount="Surface Mount", Packaging="Tape and Reel", RoHS Compliant=Yes, Series=C, Thickness=0.028inch, Voltage Rating (DC)=10V, Width=0.049inch
C15 C32 C39 C43: library part CMP-06035-052255-1, "Ceramic Capacitor 0.1pF ±0.1pF 250VDC C0G 0603 Paper T/R", Capacitance=0.1pF, Case Code (Imperial)=0603, Case Code (Metric)=1608, Dielectric=C0G, Max Operating Temperature=125°C, Min Operating Temperature=-55°C, Package Quantity=4000, Voltage Rating=250V, Case/Package=0603, Depth=0.8mm, Height=0.7mm, Length=1.6mm, Mount="Surface Mount", Packaging="Tape and Reel", Radiation Hardening=No, Termination=SMD/SMT, Thickness=0.031inch, Voltage Rating (DC)=250V, Width=0.031inch
C15 C16 C21 C22 C24 C25 C30 C31: library part CMP-2000-05002-2, "CAP CER 0.1UF 16V X7R 0603", Capacitance="100 nF", Manufacturer=YAGEO, Package=CC0603-DA, Temperature="-55°C to +125°C", Temperature Characteristic=X7R, Temperature Coefficient=15%, Temperature Range High=+125°C, Temperature Range Low=-55°C, Tolerance=0.1, Voltage="16 V", Automotive=No, Category=Cap, ComponentLink2Description=Datasheet, ComponentLink2URL=http://www.yageo.com/documents/recent/UPY-GPHC_X7R_6.3V-to-50V_18.pdf, Device Class L1="Passive Components", Device Class L2=Capacitors, Device Class L3="Ceramic Capacitors", Digikey Description="CAP CER 0.1UF 16V X7R 0603", Footprint Url=http://www.yageo.com/exep/pages/download/literatures/UPY-C_GEN_24.pdf, Height=0.9mm, Lead Free=Yes, Manufacturer Part Number=CC0603KRX7R7BB104, Material=Ceramic, Mouser Description="Multilayer Ceramic Capacitor, CC Series, 0.1 - F, - 10%, X7R, 16 V, 0603 [1608 Metric]", Octopart=https://octopart.com/cc0603krx7r7bb104-yageo-192941, RoHS=TRUE, Voltage Rating="16 V"
C18 C20 C27 C29: library part CMP-06035-007665-1, "Chip Multilayer Ceramic Capacitors for General Purpose, 1206, 16000pF, C0G, 30ppm/°C, 5%, 50V", Capacitance=16nF, Case Code (Imperial)=1206, Case Code (Metric)=3216, Dielectric=C0G, Max Operating Temperature=125°C, Min Operating Temperature=-55°C, Package Quantity=4000, Tolerance=5%, Voltage Rating=50V, Case/Package=1206, Depth=1.6mm, Height=0.85mm, Length=3.2mm, Mount="Surface Mount", Packaging="Tape and Reel", Radiation Hardening=No, Termination=SMD/SMT, Thickness=0.037inch, Voltage Rating (DC)=50V, Width=0.063inch
C33 C34 C35 C36 C37 C38 C40 C41 C42 C44 C45 C46: library part CMP-03422-000635-2, "CAP CER 3900PF 50V X7R 0603", Capacitance=3.9nF, Case Code (Imperial)=0603, Case Code (Metric)=1608, Dielectric=X7R, Dielectric Material=Ceramic, Insulation Resistance=100GR, Max Operating Temperature=125°C, Min Operating Temperature=-55°C, Package Quantity=4000, Tolerance=10%, Voltage=50V, Case/Package=0603, Construction=Flat, Depth=0.8mm, Halogen Free="Halogen Free", Height=0.8mm, Lead Free="Lead Free", Length=1.6mm, Mount="Surface Mount", Number of Pins=2, Packaging="Tape and Reel", Radiation Hardening=No, REACH SVHC="No SVHC", Resistor Type=Ceramic, RoHS Compliant=Yes, Series=CC, Termination=SMD/SMT, Thickness=0.035inch, Voltage Rating=50V, Voltage Rating (DC)=50V, Width=0.8mm
C47 C51: library part CMP-14477-004278-2, "Multilayer Ceramic Capacitor 2.2uF 50V X5R 20% SMD 0803 T/R", Capacitance=2.2uF, Case Code (Imperial)=0805, Case Code (Metric)=2012, Max Operating Temperature=85°C, Min Operating Temperature=-55°C, Tolerance=20%, Voltage Rating=50V, Case/Package=0805, Mount="Surface Mount", Packaging="Tape and Reel", RoHS Compliant=Yes
C47: library part CMP-2000-07316-1, "Tantalum Capacitor, 10 uF, +/- 20%, 10 V, -55 to 125 degC, 2-Pin SMD (M), RoHS, Tape and Reel TR8M106M010C2000", Capacitance=10µF, ESR (Equivalent Series Resistance)=2Ohm, Lifetime @ Temp.=-, Manufacturer=Vishay, Manufacturer Size Code=M, Operating Temperature=-55°C~125°C, Package / Case=0603(1608Metric), Package Description="2-Pin Surface Mount Device, Body 1.6 x 0.85 mm", Package Reference=TR8-M, Standard Package=1, Tolerance=±20%, Voltage - Rated=10V, Catalog Drawings=TR8SeriesTR8SeriesBottom, Category=Capacitors, Datasheet URL=http://www.vishay.com/docs/40114/tr8.pdf, Datasheet Version=03/2016, Family=TantalumCapacitors, Featured Product=TR8SeriesMoldedMicroTan™TantalumChipCapacitors, Features=GeneralPurpose, Height - Seated (Max)="0.035\"(0.89mm)", Lead Spacing=-, Manufacturer URL=http://www.vishay.com/, Mounting Technology=SurfaceMount, Mounting Type=SurfaceMount, Online Catalog=MICROTAN®TR8Series, Other Names=718-1673-6, Packaging=Digi-Reel®, Series=MICROTAN®TR8, Size / Dimension="0.063\"Lx0.033\"W(1.60mmx0.85mm)", Type=Molded
C48 C52: library part CMP-03020-002384-2, "CAP CER 0.1UF 16V X5R 0603", Capacitance="0.10 μF", Manufacturer=KEMET, Package=C0603C-CF, Temperature="-55°C to +125°C", Temperature Characteristic=X5R, Temperature Coefficient=30ppm/°C, Temperature Range High=+125°C, Temperature Range Low=-55°C, Tolerance=0.1, Voltage Rating="16 V", Automotive=Yes, Automotive Grade="Grade 1", Category=Cap, ComponentLink2Description=Datasheet, ComponentLink2URL=https://api.kemet.com/component-edge/download/datasheet/C0603C100J5GACAUTO.pdf, Device Class L1="Passive Components", Device Class L2=Capacitors, Device Class L3="Ceramic Capacitors", Digikey Description="CAP CER 0.1UF 16V X5R 0603", Height=0.87mm, Lead Free=Yes, Manufacturer Part Number=C0603C104K4PAC7867, Material=Ceramic, Octopart=https://octopart.com/c0603c104k4pactu-kemet-12592163, RoHS=TRUE
C49 C50 C53 C54 C55 C56 C58 C59 C62: library part Cap, "Capacitor", LatestRevisionDate=17-Jul-2002, LatestRevisionNote="Re-released for DXP Platform.", PackageDescription="Radial Cap, Thru-Hole; 2 Leads; 0.3 in Pin Spacing", PackageReference=RAD-0.3, Published=8-Jun-2000, Publisher="Altium Limited"
C57: library part CMP-03020-000918-1, "C0402 0.10 μF X5R 10.00% 10 V", Capacitance="0.10 μF", Manufacturer=Kemet, Package=C0402-BB, Temperature="-55°C to +125°C", Temperature Characteristic=X5R, Temperature Coefficient=15%, Temperature Range High=+125°C, Temperature Range Low=-55°C, Tolerance=0.1, Voltage Rating="10 V", Automotive=No, Category=Cap, ComponentLink2Description=Datasheet, ComponentLink2URL=https://content.kemet.com/datasheets/KEM_C1002_X7R_SMD.pdf, Device Class L1="Passive Components", Device Class L2=Capacitors, Device Class L3="Ceramic Capacitors", Height=0.55mm, Ipc Land Pattern Name=CAPC10050X50, Lead Free=Yes, Manufacturer Part Number=C0402C104K8PAC, Material=Ceramic, Mouser Description="Cap-fxd 0.1UF +-10PCT 10V Cer X5R 0402 S", Octopart=https://octopart.com/c0402c104k8pac-kemet-2645080, RoHS=TRUE
C60: library part CMP-03020-017963-1, "C1206 4,700 pF C0G 5.00% 50 V", Capacitance="4,700 pF", Manufacturer=KEMET, Package=C1206C-EB, Temperature="-55°C to +150°C", Temperature Characteristic=C0G, Temperature Coefficient=15%, Temperature Range High=+150°C, Temperature Range Low=-55°C, Tolerance=0.05, Voltage Rating="50 V", Automotive=Yes, Automotive Grade="Grade 0", Category=Cap, ComponentLink2Description=Datasheet, ComponentLink2URL=https://content.kemet.com/datasheets/KEM_C1007_X8R_ULTRA_150C_SMD.pdf, Device Class L1="Passive Components", Device Class L2=Capacitors, Device Class L3="Ceramic Capacitors", Height=0.88mm, Ipc Land Pattern Name=CAPC320160X78, Lead Free=Yes, Manufacturer Part Number=C1206C472J5GAC, Material=Ceramic, Mouser Description="Multilayer Ceramic Capacitors MLCC - SMD/SMT 50volts 4700pF 5% C0G", Octopart=https://octopart.com/c1206c472j5gac-kemet-1350327, RoHS=TRUE
C61: library part CMP-03020-009089-1, "C0402 10,000 pF X7R 5.00% 16 V", Capacitance="10,000 pF", Manufacturer=Kemet, Package=C0402-BB, Temperature="-55°C to +125°C", Temperature Characteristic=X7R, Temperature Coefficient=15%, Temperature Range High=+125°C, Temperature Range Low=-55°C, Tolerance=0.05, Voltage Rating="16 V", Automotive=No, Category=Cap, ComponentLink2Description=Datasheet, ComponentLink2URL=https://content.kemet.com/datasheets/KEM_C1002_X7R_SMD.pdf, Device Class L1="Passive Components", Device Class L2=Capacitors, Device Class L3="Ceramic Capacitors", Height=0.55mm, Ipc Land Pattern Name=CAPC10050X50, Lead Free=Yes, Manufacturer Part Number=C0402C103J4RAC, Material=Ceramic, Mouser Description="Multilayer Ceramic Capacitors MLCC - SMD/SMT 16volts 0.01uF 5% X7R", Octopart=https://octopart.com/c0402c103j4rac-kemet-8293494, RoHS=TRUE
C63: library part CMP-08246-001552-1, "Cap Ceramic 6.8pF 25V C0G 0.5pF Pad SMD 0201 125°C Automotive T/R", Capacitance=6.8pF, Case Code (Imperial)=0201, Case Code (Metric)=0603, Dielectric=C0G, Max Operating Temperature=125°C, Min Operating Temperature=-55°C, Package Quantity=1, Ratings=AEC-Q200, Voltage Rating=25V, Case/Package=0201, Composition=Ceramic, Depth=0.3mm, Height=0.3mm, Length=0.6mm, Mount="Surface Mount", Packaging="Tape and Reel", Termination=SMD/SMT, Thickness=0.013inch, Voltage Rating (DC)=25V, Weight=6E-06oz, Width=0.012inch
C64: library part CMP-1036-00734-2, "CAP CER 7.5PF 50V NP0 0805", Capacitance="7.5 pF", Manufacturer=KEMET, Package=C0805C-DN, Temperature="-55°C to +125°C", Temperature Characteristic=C0G, Temperature Coefficient=30ppm/°C, Temperature Range High=+125°C, Temperature Range Low=-55°C, Tolerance="0.5 pF", Voltage Rating="50 V", Automotive=No, Category=Cap, ComponentLink2Description=Datasheet, ComponentLink2URL=https://content.kemet.com/datasheets/KEM_C1003_C0G_SMD.pdf, Device Class L1="Passive Components", Device Class L2=Capacitors, Device Class L3="Ceramic Capacitors", Digikey Description="CAP CER 7.5PF 50V NP0 0805", Height=0.88mm, Ipc Land Pattern Name=CAPC200125X78, Lead Free=Yes, Manufacturer Part Number=C0805C759D5GACTU, Material=Ceramic, Mouser Description="Multilayer Ceramic Capacitors MLCC - SMD/SMT 50volts 7.5pF C0G 0.5%", Octopart=https://octopart.com/c0805c759d5gactu-kemet-17134963, RoHS=TRUE
C?: library part CMP-2006-04004-2, "General Purpose Ceramic Capacitor, 0603, 18pF, 5%, NP0, 30ppm/°C, 100V", Capacitance=18pF, Case Code (Imperial)=0603, Case Code (Metric)=1608, Dielectric=C0G, Dielectric Material=Ceramic, Insulation Resistance=100GR, Max Operating Temperature=125°C, Min Operating Temperature=-55°C, Package Quantity=4000, Temperature Coefficient=30ppm/°C, Tolerance=5%, Voltage=100V, Case/Package=0603, Contact Plating=Tin, Depth=0.81mm, Height=0.9mm, Lead Free="Lead Free", Length=1.6mm, Mount="Surface Mount", Number of Pins=2, Packaging="Tape and Reel", Radiation Hardening=No, REACH SVHC="No SVHC", RoHS Compliant=Yes, Termination=SMD/SMT, Thickness=0.035inch, Voltage Rating=100V, Voltage Rating (DC)=100V, Width=0.032inch
D1 D2: library part CMP-1055-00280-1, "Schottky Power Rectifier, 2-Pin Powermite, Pb-Free, Tape and Reel", Manufacturer="On Semiconductor", ComponentLink1Description="Manufacturer URL", ComponentLink1URL=http://www.onsemi.com/, ComponentLink2Description=Datasheet, ComponentLink2URL=http://www.onsemi.cn/pub_link/Collateral/MBRM120E-D.PDF, ComponentLink3Description="Package Specification", ComponentLink3URL=http://www.onsemi.com/pub_link/Collateral/457-04.PDF, Configuration=Single, DatasheetVersion="Rev. 3", IFSM Max (A)=50, Mounting Technology="Surface Mount", PackageDescription="2-Pin POWERMITE, Body 1.965 x 1.9 mm", PackageReference=POWERMITE-2-457-04, PackageVersion="Rev. F, 05/2013", Packing="Tape and Reel", PartNumber=MBRM120ET3G, RoHS=TRUE
L1 L2: library part CMP-1396-00050-1, "SMD-Shielded Power Inductor WE-PD, L=4.70 µH", Inductance="4.70 ÂµH", Manufacturer="Wuerth Elektronik", ComponentLink1Description="Manufacturer URL", ComponentLink1URL=http://www.we-online.com, ComponentLink2Description=Datasheet, ComponentLink2URL=http://www.we-online.de/katalog/media/pdf/7447789004.pdf, PackageDescription="SMD Inductor, 2-Leads, Body 7.3 x 7.3 mm", PackageReference=WE-PD-S-PB, PartNumber=7447789004
L3: library part Inductor, "Inductor", Code_IEC=1005, Code_JEITA=0402, LatestRevisionDate=29-May-2009, LatestRevisionNote="IPC-7351 Footprint Added.", PackageDescription="Chip Inductor", PackageReference=0402-A, Published=8-Jun-2000, Publisher="Altium Limited"
MCLR: library part CMP-1459-00005-1, "WS-TASV SMD Tact Switch 6.0X3.5 mm", Manufacturer="Wuerth Elektronik", ComponentLink1Description="Manufacturer URL", ComponentLink1URL=http://www.we-online.com, ComponentLink2Description=Datasheet, ComponentLink2URL=http://katalog.we-online.de/em/datasheet/434121043816.pdf, NoPins=02, PackageReference=434121043816, PartNumber=434121043816
Q1: library part MOSFET-P, "P-Channel MOSFET", LatestRevisionDate=17-Jul-2002, LatestRevisionNote="Re-released for DXP Platform.", PackageDescription="TO, Flat Index; 3 In-Line, Axial Leads; Body Dia. 4.6mm; Lead Dia. 0.5 mm (max)", PackageReference=E3, PackageVersion=1995/1996, Published=8-Jun-2000, Publisher="Altium Limited"
R1: library part CMP-1011-00001-2, "RC0402JR-070RL", Manufacturer="Yageo / Phycomp", Part Number=RC0402JR-070RL
R2: library part CMP-2002-00609-3, "Chip Resistor, 1 MOhm, +/- 1%, 100 mW, -55 to 155 degC, 0402 (1005 Metric), RoHS, Tape and Reel / ERJ-2RKF1004X", Case Code (Imperial)=0402, Case Code (Metric)=1005, Manufacturer="Basic Passives", Max Operating Temperature="155 degC", Min Operating Temperature="-55 degC", Package Quantity=10000, PartNumber=ERJ-2RKF1004X, Power Rating="100 mW", Resistance="1 MOhm", Tolerance=1%, Voltage Rating="50 V", Case\/Package=0402, ComponentLink1Description="Manufacturer URL", ComponentLink1URL=http://www.panasonic.com/, ComponentLink2Description=Datasheet, ComponentLink2URL=http://industrial.panasonic.com/cdbs/www-data/pdf/RDA0000/AOA0000C86.pdf, DatasheetVersion=04/2015, Height="0.35 mm", Length="1 mm", Mount="Surface Mount", Mounting Technology="Surface Mount", PackageDescription="2-Pin Surface Mount Device, Body 1 x 0.5 mm", PackageReference=0402, Packaging="Tape and Reel", Pins=2, Radiation Hardening=No, REACH SVHC=Yes, RoHSCompliant=true, Weight=2.8E-05oz, Width="0.5 mm"
R3: library part CMP-2000-07588-1, "Chip Resistor, 10 KOhm, +/- 1%, 0.1 W, -55 to 155 degC, 0402 (1005 Metric), RoHS, Tape and Reel / ERJ2RKF1002X", Case Code (Imperial)=0402, Case Code (Metric)=1005, Manufacturer=Panasonic, Max Operating Temperature=155degC, Max Power Dissipation=100mW, Min Operating Temperature=-55degC, Package Description="2-Pin Surface Mount Device, Body 1 x 0.5 mm", Package Quantity=1, Package Reference=402, Resistance=10KOhm, Temperature Coefficient=100ppm\/degreesC, Tolerance=1%, Voltage Rating=50V, Case\/Package=0402, Composition=ThickFilm, Contact Plating=Tin, Datasheet URL=https://industrial.panasonic.com/cdbs/www-data/pdf/RDA0000/AOA0000C304.pdf, Datasheet Version=02/2017, Depth=0.5mm, Height=0.35mm, Lead Free=LeadFree, Length=1mm, Manufacturer URL=http://www.panasonic.com/, Military Standard=Not, Mount=SurfaceMount, Mounting Technology=SurfaceMount, Number of Pins=2, Number of Terminations=2, Packaging=TapeandReel, Power Rating=100mW, Radiation Hardening=No, REACH SVHC=NoSVHC, RoHSCompliant=True, Termination=SMD/SMT, Voltage Rating (DC)=50V, Width=0.02inch
R4 R5 R6 R7 R10 R11 R16 R17 R22 R23 R28 R29: library part CMP-2100-03671-1, "Chip Resistor, 1 KOhm, +/- 1%, 125 mW, -55 to 155 degC, 0805 (2012 Metric), RoHS, Tape and Reel", Case Code (Imperial)=0805, Case Code (Metric)=2012, Manufacturer=Yageo, Max Operating Temperature=155degC, Max Power Dissipation=125mW, Min Operating Temperature=-55degC, Package Description="2-Pin Surface Mounted Device, Body 2 x 1.25 mm", Package Quantity=1, Resistance=1KOhm, Temperature Coefficient=100ppm/degreesC, Tolerance=1%, Voltage Rating=150V, Case/Package=0805, Composition=ThickFilm, Datasheet URL=http://www.yageo.com/NewPortal/yageodocoutput?fileName=/pdf/R-Chip/PYu-RC_Group_51_RoHS_L_5.pdf, Datasheet Version="Rev. 5, 10/2016", Depth=1.25mm, Height=0.024inch, Lead Free=LeadFree, Length=0.079inch, Manufacturer URL=http://www.yageo.com/, Military Standard=Not, Number of Pins=2, Number of Terminations=2, Package Reference=0805, Packaging=TapeandReel, Power Rating=125mW, REACH SVHC=Unknown, RoHSCompliant=true, Termination=SMD/SMT, Voltage Rating (DC)=150V, Width=0.049inch
R8 R9 R14 R15 R20 R21 R26 R27: library part CMP-2001-04406-1, Manufacturer=Panasonic, Part Number=ERJ-6ENF1241V
R12 R13 R18 R19 R24 R25 R30 R31: library part CMP-2000-03264-2, "RES Thick Film, 35.7kΩ, 1%, 0.1W, 100ppm/°C, 0603", Case Code (Imperial)=0603, Case Code (Metric)=1608, Max Operating Temperature=155°C, Max Power Dissipation=100mW, Min Operating Temperature=-55°C, Package Quantity=10, Resistance=35.7kR, Temperature Coefficient=100ppm/°C, Tolerance=1%, Voltage Rating=75V, Case/Package=0603, Composition="Thick Film", Contact Plating=Tin, Depth=0.85mm, Features="Automotive AEC-Q200", Height=0.45mm, Length=1.55mm, Military Standard=Not, Number of Pins=2, Number of Terminations=2, Packaging="Tape and Reel", Power Rating=100mW, Radiation Hardening=No, Termination=Solder, Weight=7.1E-05oz, Width=0.033inch
R32 R34: library part CMP-04015-080178-1, "100kΩ ±1% 0.125W Chip Resistor 0805 Thick Film AEC-Q200 Qualified", Case Code (Imperial)=0805, Case Code (Metric)=2012, Max Operating Temperature=125°C, Min Operating Temperature=-55°C, Power Rating=125mW, Resistance=100kR, Temperature Coefficient=50ppm/°C, Tolerance=1%, Voltage Rating=150V, Packaging="Tape and Reel", RoHS Compliant=Yes, Series=RK73G, Termination=SMD/SMT
R33: library part CMP-26527-006791-1, "22.1kΩ ±1% 0.125W 0805 Thick Film Chip Resistor AEC-Q200 compliant", Case Code (Imperial)=0805, Case Code (Metric)=2012, Max Operating Temperature=155°C, Max Power Dissipation=125mW, Min Operating Temperature=-55°C, Package Quantity=10000, Resistance=22.1kR, Resistor Type="Thick Film", Temperature Coefficient=100ppm/°C, Tolerance=1%, Case/Package=0805, Contact Plating=Tin, Features="Automotive AEC-Q200", Height=0.026inch, Lead Free="Lead Free", Length=0.079inch, Mount="Surface Mount", Number of Terminations=2, Packaging="Tape and Reel", Radiation Hardening=No, RoHS Compliant=Yes, Series=RMCF, Width=0.049inch
R35 R36 R37 R38 R39 R40: library part Res1, "Resistor", LatestRevisionDate=17-Jul-2002, LatestRevisionNote="Re-released for DXP Platform.", PackageDescription="Axial Device, Thru-Hole; 2 Leads; 0.3 in Pin Spacing", PackageReference=AXIAL-0.3, Published=8-Jun-2000, Publisher="Altium Limited"
R41: library part CMP-03412-011629-2, "RES 100Ω 1.00% 0.1W 0603", Case/Package=0603, Resistance=100Ω, Tolerance=1%, RoHS Compliant=Yes
U3: library part CMP-09093-000114-1, "IC DRIVER 1/0 8SOIC", Case/Package=SOIC, Max Operating Temperature=85°C, Max Supply Current=10mA, Max Supply Voltage=3.6V, Min Operating Temperature=-40°C, Min Supply Voltage=3V, Nominal Supply Current=7mA, Operating Supply Voltage=3.3V, Package Quantity=98, Data Rate=600Mbps, Height=1.5mm, Lead Free="Contains Lead", Length=5mm, Mount="Surface Mount", Number of Drivers=1, Number of Elements=1, Number of Pins=8, Number of Receivers=1, Operating Supply Current=7mA, Packaging=Rail/Tube, Propagation Delay=1.5ns, Radiation Hardening=No, REACH SVHC="No SVHC", RoHS Compliant=Yes, Series=-, Supply Current=7mA, Turn-On Delay Time=1.5ns, Width=4mm
U6: library part CMP-0347-00005-4, "Boost Inverting Buck-Boost Voltage Converter with 2.7 to 5.5 V Input and -15 to 15 V Output, -40 to 85 degC, 24-Pin VQFN (RGE), Green (RoHS & no Sb/Br)", Manufacturer="Texas Instruments", PartNumber=TPS65130RGER, Switching Frequency(Typ)(kHz)=1400, Code_JEDEC=MO-220, ComponentLink1Description=Datasheet, ComponentLink1URL=http://www.ti.com/general/docs/lit/getliterature.tsp?genericPartNumber=TPS65130&fileType=pdf, ComponentLink2Description="Package Specification", ComponentLink2URL=http://www.ti.com/litv/pdf/mpqf124f, DatasheetVersion=SLVS493B, Eco-Plan="Green (RoHS & no Sb/Br)", Mounting Technology="Surface Mount", PackageDescription="24-Pin Plastic Quad Flatpack No-Lead, 4 x 4 mm Body, 0.5 mm Pitch", PackageReference=RGE0024B, PackageVersion="revG, Jul-2011", Regulated Outputs(#)=2, SubFamily="Step-Up Regulator", Topology="Boost, Inverting Buck-Boost", Vin(Max)(V)=5.5, Vin(Min)(V)=2.7, Vout2(V)="-15 to -2", Vout(Max)(V)=15, Vout(Min)(V)=-15
X1: library part CMP-27762-013587-1, "Crystal 20MHz ±20ppm 18pF SMD-2 6mm x 3.5mm / ABM7-20.000MHZ-D2Y-T", Case/Package=CSMD, ESR (Equivalent Series Resistance)=50R, Frequency Stability=30ppm, Frequency Tolerance=20ppm, Load Capacitance=18pF, Max Operating Temperature=85°C, Min Operating Temperature=-40°C, Operating Frequency="20 MHz", Package Quantity=1000, Resistor Type=Ceramic, Contact Plating=Gold, Depth=3.5mm, Frequency=20MHz, Height=0.055inch, Lead Free="Lead Free", Length=6mm, Mount="Surface Mount", Number of Pins=2, Packaging="Tape and Reel", Radiation Hardening=No, Series=ABM7, Series Resistance=50R, Termination=SMD/SMT, Tolerance=20ppm, Width=0.138inch
L4: Code_IEC=1005, Code_JEITA=0402, LatestRevisionDate=29-May-2009, LatestRevisionNote="IPC-7351 Footprint Added.", PackageDescription="Chip Inductor", PackageReference=0402-A, Published=8-Jun-2000, Publisher="Altium Limited"

## Via types
v1: diameter 19.68, hole 7.87, Top Layer to Bottom Layer, 5 vias

## Nets (pads, with @x,y where several pads share a name; then routed paths per layer and width w, separated by ;. In a path a pad name is that pad's centre, name@x,y a point inside that pad or via, vN(x,y) a via of type N, cw(c..) or ccw(c..) an arc to the next point about the centre after c; other vN are vias at no path point)
+3.3V: C1.2 C2.2 C3.2 C4.2 C8.2 C11.2 C47.1@3600,2407.36 C48.1@3380,2390.47 C57.1 J2.2 L3.2 R3.2 R32.1 R41.1 U1.10 U1.19 U1.26 U1.35 U1.38 U1.57 U2.25 U3.1 | length 138.7
  Bottom Layer w10: C4.2 2110.08,2715 2168.46,2656.61 U1.57
+5V: C13.2 C19.1 C28.1 L4.2 R34.2 U2.29 U6.3
+10.5V: C14.1 C15.1@3080.47,4265 C21.1 C23.1 C24.1 C30.1 C63.1 D1.1 U6.23
-10V: C16.1 C17.1 C22.1 C25.1 C26.1 C31.1 C64.2 D2.2 U6.15
A_GP0: U1.42
A_GP1: U1.43
A_GP2: U1.44
ADC_CH0_CH1_N: C44.1 C45.1 R30.2 U2.32
ADC_CH0_CH1_P: C45.2 C46.1 R31.2 U2.31
ADC_CH2_CH3_N: C40.1 C41.2 R24.2 U2.2
ADC_CH2_CH3_P: C41.1 C42.1 R25.2 U2.1
ADC_CH4_CH5_N: C36.1 C37.1 R18.2 U2.8
ADC_CH4_CH5_P: C37.2 C38.1 R19.2 U2.7
ADC_CH6_CH7_N: C33.1 C34.2 R12.2 U2.10
ADC_CH6_CH7_P: C34.1 C35.1 R13.2 U2.9
ADCSDI_PIC32SDO: U1.52 U2.20 | length 270.9
  Bottom Layer w10: U2.20 2107.27,2469.84 2171.25,2533.82 2171.88,2533.82 2196.25,2558.19 U1.52
ADCSDO_PIC32SDI: U1.47 U2.22 | length 303.5
  Bottom Layer w10: U2.22 2236.32,2430.47 2268.82,2462.97 2268.82,2473.27 U1.47
B_GP0: U1.62
B_GP1: U1.61
B_GP2: U1.60
BSW: 
C_GP0: U1.64
C_GP1: U1.1
C_GP2: U1.2
CB1: C48.2@4410,1608.62
CB2: C52.1
CN: C60.1 U6.18
CP: C61.1 U6.21
D_GP0: U1.5
D_GP1: U1.4
D_GP2: U1.3
DOUT_N: U3.8
DOUT_P: U3.7
FB: R34.1
FBN: C64.1 U6.16
FBP: C63.2 U6.22
GND: C1.1 C2.1 C3.1 C4.1 C5.2 C6.2 C7.2 C8.1 C9.2 C10.2 C11.1 C12.1 C13.1 C14.2 C15.2 C16.2 C17.2 C18.2 C19.2 C20.2 C21.2 C22.2 C23.2 C24.2 C25.2 C26.2 C27.2 C28.2 C29.2 C30.2 C31.2 C32.2 C33.2 C35.2 C36.2 C38.2 C39.2 C40.2 C42.2 C43.2 C44.2 C46.2 C47.2 C48.2@3380,2449.53 C51.2 C57.2 C60.2 C61.2 J2.3 L2.1 MCLR.1 R9.1 R15.1 R21.1 R27.1 R33.1 U1.9 U1.20 U1.25 U1.41 U1.65 U1.66 U1.67 U1.68 U1.69 U1.70 U1.71 U1.72 U1.73 U1.74 U1.75 U1.76 U1.77 U2.11 U2.14 U2.15 U2.17 U2.23 U2.26 U2.27 U2.30 U2.33 U3.4 U6.6 U6.19 | length 944.1
  Bottom Layer w10: U2.30 1865.47,2430.47 U2.33 ; U2.11 1865.47,2489.53 U2.33 ; U2.27 U2.33@1924.53,2430.47 ; U2.14 U2.33@1924.53,2489.53 ; U2.26 U2.33@1944.21,2410.79 ; U2.15 U2.33@1944.21,2509.21 ; U2.23 U2.33@1944.21,2410.79 ; U2.17 1963.9,2528.9 U2.33@1944.21,2509.21 ; U1.9 2406.89,2856.97 2429.92,2880 C1.1 ; U1.25 2570.55,2636.65 2662.64,2636.65 C3.1 ; U1.20 2599.11,2735.35 2630.83,2703.64 2652.07,2703.64 C2.1@2660,2695.71 ; U2.33 U2.33@1924.53,2430.47 ; U2.33 U2.33@1924.53,2489.53 ; U2.33@1924.53,2430.47 U2.33@1944.21,2410.79 ; U2.33@1924.53,2489.53 U2.33@1944.21,2509.21
INP: D1.2 L1.2 U6.24
MCLR: J2.1 MCLR.2 R3.1 U1.7 | length 1206.5
  Bottom Layer w10: U1.7 2367.52,2872.52 2420.5,2925.5 2915.92,2925.5 2945.5,2895.92 2945.5,2425.5 J2.1
MULTI: R41.2 U6.9 U6.10 U6.11
MUXOUT_ADCIN+: U2.3 U2.4 | length 143.7
  Bottom Layer w10: U2.3 1740.86,2430.47 1735.16,2436.17 1735.16,2444.46 1740.86,2450.16 U2.4
MUXOUT_ADCIN-: U2.5 U2.6 | length 144.3
  Bottom Layer w10: U2.5 1740.16,2469.84 1735,2475 1735,2483.67 1740.86,2489.53 U2.6
NetB2_4: R32.2 R33.2
NetC5_1: C5.1 U1.56 | length 115.1
  Bottom Layer w10: C5.1 2170.22,2630 2177.15,2636.93 U1.56
NetC6_1: C6.1 R2.1 U1.40 X1.1
NetC7_1: C7.1 R1.2 R2.2 X1.2
NetC15_1: C15.1@6560,4789.49
NetC18_1: C18.1 R4.1
NetC20_1: C20.1 R5.1
NetC27_1: C27.1 R6.1
NetC29_1: C29.1 R7.1
NetC32_1: C32.1
NetC39_1: C39.1
NetC43_1: C43.1 U6.2
NetR1_1: R1.1 U1.39
NetR4_2: R4.2
NetR5_2: R5.2
NetR6_2: R6.2
NetR7_2: R7.2
NetR8_2: R8.2 R10.1
NetR9_2: R9.2 R11.1
NetR10_2: R10.2 R12.1
NetR11_2: R11.2 R13.1
NetR14_2: R14.2 R16.1
NetR15_2: R15.2 R17.1
NetR16_2: R16.2 R18.1
NetR17_2: R17.2 R19.1
NetR20_2: R20.2 R22.1
NetR21_2: R21.2 R23.1
NetR22_2: R22.2 R24.1
NetR23_2: R23.2 R25.1
NetR26_2: R26.2 R28.1 U6.1
NetR27_2: R27.2 R29.1 U6.8
NetR28_2: R28.2 R30.1 U6.4
NetR29_2: R29.2 R31.1 U6.5
NetR39_1: 
NetU1_22: U1.22
NetU1_46: U1.46 U2.24 | length 340.4
  Bottom Layer w10: U2.24 2218.17,2391.1 2288.5,2461.44 2288.5,2473.27 U1.46
NetU1_53: U1.53 U2.19 | length 270.9
  Bottom Layer w10: U2.19 2105.74,2489.53 2165.03,2548.82 2165.67,2548.82 2194.72,2577.87 U1.53
NetU1_54: U1.54 U2.18 | length 270.9
  Bottom Layer w10: U2.18 2104.21,2509.21 2158.82,2563.82 2159.45,2563.82 2193.2,2597.56 U1.54
NetU1_55: U1.55 U2.16 | length 285.9
  Bottom Layer w10: U2.16 2128.28,2554.49 2153.86,2580.08 2154.5,2580.08 2191.67,2617.24 U1.55
OUTN: D2.1 L2.2 U6.13 U6.14
PGA_A_Out: R26.1
PGA_B_Out: R20.1
PGA_C_Out: R14.1
PGA_D_Out: R8.1
PGC: J2.5 U1.17 | length 326.1
  Bottom Layer w10: U1.17@2577.09,2794.69 2577.17,2794.76 2858.73,2794.76 2878.49,2775 J2.5
PGD: J2.4 U1.18 | length 353.9